# EAGLE board robinson_v01 (EAGLE 7.5.0)
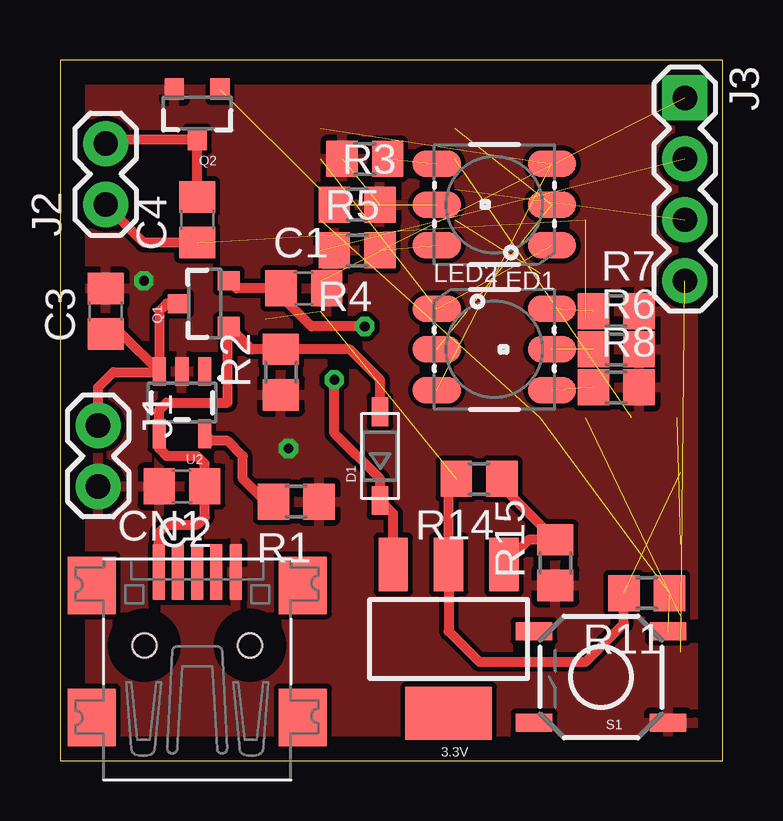
[diagram p0: board, top side]
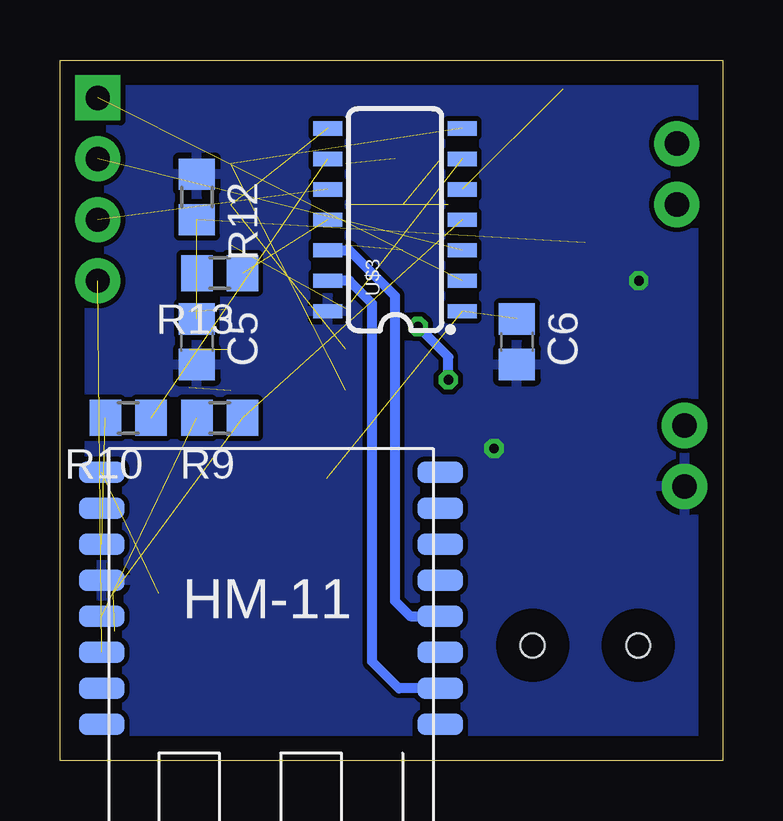
[diagram p1: board, bottom side, seen from below]

Size 27.61 x 29.2 mm. Coordinates in mm from the lower left corner, seen from the top.
Outline: 0,0 27.61,0 27.61,29.2 0,29.2 0,0
Copper layers (1*16): Top 0.035mm / dielectric 1.5mm / Bottom 0.035mm
Design rules "default": minimum track width 10mil, minimum drill 24mil, track to track 8mil, track to pad 8mil, pad to pad 8mil, via to via 8mil, smd to smd 8mil, copper to edge 40mil, drill to drill 8mil, minimum pad ring 10mil, minimum via ring 8mil, stop-mask expansion 4mil, vias tented up to drill 0mil, thermal gap 10mil

## Footprints (pad centres in the part's own frame; a part is rotated, then mirrored left to right if it is on the bottom)
SOT223 = smd 1.219 x 2.235: 1 -2.311,-3.099; 2 0,-3.099; 3 2.311,-3.099 | smd 3.6 x 2.2: 4 0,3.099
C0805 = smd 1.3 x 1.5: 1 -0.95,0; 2 0.95,0
USB-MINIB = smd 0.5 x 2.308: D+ 0,4.064; D- -0.8,4.064; GND 1.6,4.064; ID 0.8,4.064; VBUS -1.6,4.064 | smd 2 x 2.4: GND1 -4.4,-2; GND2 -4.4,3.5; GND3 4.4,3.5; GND4 4.4,-2 | hole 1: -2.2,1; 2.2,1
SOD-123 = smd 1.2 x 0.7: A 1.85,0; C -1.85,0
1X02 = drill 1.016 pad 1.88: 1 0,0; 2 2.54,0
1X04 = drill 1.016 pad 1.88 square: 1 0,0 | drill 1.016 pad 1.88: 2 2.54,0; 3 5.08,0; 4 7.62,0
LED-TRICOLOR-5050 = smd 2 x 1.1: 1 -2.4,1.7; 2 -2.4,0; 3 -2.4,-1.7; 4 2.4,-1.7; 5 2.4,0; 6 2.4,1.7
SOT23-3 = smd 0.8 x 0.9: 1 -0.95,-1; 2 0.95,-1; 3 0,1.1
R0805 = smd 1.3 x 1.5: 1 -0.95,0; 2 0.95,0
TACTILE-SWITCH-SMD = smd 1.524 x 0.762: 1 -2.794,1.905; 2 2.794,1.905; 3 -2.794,-1.905; 4 2.794,-1.905
SOT23-5 = smd 0.55 x 1.2: 1 -0.95,-1.3; 2 0,-1.3; 3 0.95,-1.3; 4 0.95,1.3; 5 -0.95,1.3
HM-11 = smd 1.9 x 0.9: 1 -0.3,11.5; 2 -0.3,10; 3 -0.3,8.5; 4 -0.3,7; 5 -0.3,5.5; 6 -0.3,4; 7 -0.3,2.5; 8 -0.3,1; 9 13.8,1; 10 13.8,2.5; 11 13.8,4; 12 13.8,5.5; 13 13.8,7; 14 13.8,8.5; 15 13.8,10; 16 13.8,11.5
SO14 = smd 0.6 x 1.2: 1 -3.81,-2.8; 2 -2.54,-2.8; 3 -1.27,-2.8; 4 0,-2.8; 5 1.27,-2.8; 6 2.54,-2.8; 7 3.81,-2.8; 8 3.81,2.8; 9 2.54,2.8; 10 1.27,2.8; 11 0,2.8; 12 -1.27,2.8; 13 -2.54,2.8; 14 -3.81,2.8

## Placement (x,y rotation side)
3.3V  V_REG_317SMD  [SOT223]  16.19,5.08 180 top
C1  1uF  [C0805]  10.16,19.68 0 top
C2  4.7uF  [C0805]  5.08,11.43 180 top
C3  4.7uF  [C0805]  1.91,18.73 90 top
C4  .1uF  [C0805]  5.71,22.54 90 top
C5  .1uF  [C0805]  21.91,17.46 270 bottom
C6  4.7uF  [C0805]  8.57,17.46 270 bottom
CN1  [USB-MINIB]  5.71,3.81 0 top
D1  B130LAW  [SOD-123]  13.34,12.7 90 top
J1  3.7_LIPO  [1X02]  1.59,13.97 270 top
J2  3.3-4.5 Motor  [1X02]  1.91,23.18 90 top
J3  [1X04]  26.04,27.62 270 top
LED1  LED-TRICOLOR-5050NO_IC  [LED-TRICOLOR-5050]  18.1,23.18 180 top
LED2  LED-TRICOLOR-5050NO_IC  [LED-TRICOLOR-5050]  18.1,17.14 0 top
Q1  DMP1045U  [SOT23-3]  6.03,19.05 90 top
Q2  MMBT2222A  [SOT23-3]  5.71,26.99 180 top
R1  [R0805]  9.84,10.79 180 top
R2  100K  [R0805]  9.21,16.19 90 top
R3  180  [R0805]  12.38,23.18 0 top
R4  110  [R0805]  12.38,21.27 180 top
R5  110  [R0805]  12.7,25.08 180 top
R6  180  [R0805]  23.18,17.14 0 top
R7  110  [R0805]  23.18,18.73 0 top
R8  110  [R0805]  23.18,15.56 0 top
R9  470  [R0805]  20.95,14.29 180 bottom
R10  470  [R0805]  24.77,14.29 180 bottom
R11  10K  [R0805]  24.45,6.99 180 top
R12  10M  [R0805]  21.91,23.5 270 bottom
R13  10M  [R0805]  20.95,20.32 180 bottom
R14  240  [R0805]  17.46,11.75 180 top
R15  390  [R0805]  20.64,8.26 90 top
S1  RESET  [TACTILE-SWITCH-SMD]  22.54,3.49 180 top
U2  MCP73831  [SOT23-5]  5.08,14.92 180 top
U$1  HM-11  [HM-11]  12.06,13.02 180 bottom
U$3  ATTINY84  [SO14]  13.65,22.54 90 bottom

## Library data of the parts
3.3V = SparkFun-PowerIC
C1-C6 R1-R15 = resistor
CN1 D1 = adafruit
J1 J2 = SparkFun-Connectors
J3 = SparkFun-Connectors; PROD_ID: CONN-09696
LED1 LED2 = SparkFun-LED
Q1 = SparkFun-DiscreteSemi; PROD_ID: TRANS-08285
Q2 = SparkFun-DiscreteSemi; PROD_ID: TRANS-08049
S1 = SparkFun-Retired; PROD_ID: SWCH-08247
U2 = SparkFun-PowerIC; PROD_ID: IC-09995
U$1 = HM-11-ladvien
U$3 = SparkFun-DigitalIC; PROD_ID: IC-11285

## Nets
5V: C2.1 CN1.VBUS D1.A Q1.1 R2.2 U2.4
BATT_MONT: R13.1 U$3.11
BLUE: LED1.3 LED2.3 U$3.7
GND: C1.2 C2.2 C3.2 C5.2 C6.2 CN1.GND J1.2 Q2.2 R1.1 R2.1 R3.2 R4.2 R5.2 R6.2 R7.2 R8.2 R12.1 R15.1 S1.1 U2.2 U$1.12 U$3.14
GREEN: LED1.1 LED2.1 U$3.6
HM_RES: R10.1 U$3.9
MOTOR: Q2.1 U$3.5
N$6: R10.2 U$1.11
N$7: C4.2 J2.2 Q2.3
N$9: 3.3V.1 R14.1 R15.2
N$18: LED1.5 R3.1
N$19: 3.3V.3 C1.1 D1.C Q1.2
N$20: R1.2 U2.5
N$21: LED1.6 R4.1
N$23: LED1.4 R5.1
N$27: LED2.5 R6.1
N$28: LED2.6 R7.1
N$29: LED2.4 R8.1
PA3: J3.3 U$3.10
PB0: J3.1 U$3.2
PB1: J3.2 U$3.3
PIO2: J3.4 U$1.14
PIO3: R9.2 U$1.13
RED: LED1.2 LED2.2 U$3.8
RESET: R9.1 R11.1 S1.3 U$3.4
RX: U$1.2 U$3.13
TX: U$1.4 U$3.12
V_BAT: C3.1 J1.1 Q1.3 U2.3
V_BATT: C4.1 C5.1 J2.1 R12.2 R13.2
VCC: 3.3V.2 C6.1 R11.2 R14.2 U$1.9 U$3.1

## Tracks (layer width: path | path; a pad name or v marks a point on that pad's centre or on a via)
5V
  Top 0.406: CN1.VBUS 4.12,9.51 4.45,9.84 5.71,9.84 6.03,10.16 C2.1 6.03,12.38 5.71,12.7 4.45,12.7 4.13,13.02 U2.4 4.13,14.61 4.45,14.92 6.99,14.92 6.99,18.05 Q1.1 7.99,17.14 R2.2 12.06,17.14 13.34,15.88 D1.A
BATT_MONT  (1 unrouted)
BLUE  (2 unrouted)
GND  (via drill 0.4)  (1 unrouted)
  other vias: 9.53,13.02 3.49,20
  pour Bottom: 0,0 -0.32,29.21 27.94,29.21 27.94,0
  pour Top: 0,0 -0.32,29.84 27.94,29.84 27.94,0
GREEN  (2 unrouted)
HM_RES  (1 unrouted)
MOTOR  (1 unrouted)
N$6  (1 unrouted)
N$7
  Top 0.406: C4.2 Q2.3 2.08,25.89 J2.2
N$9
  Top 0.406: R14.1 18.41,11.43 R15.2 19.53,9.21 3.3V.1
N$18  (1 unrouted)
N$19  (via drill 0.4)
  Top 0.406: 3.3V.3 13.88,10.3 D1.C 13.34,11.75 11.43,13.65 v11.43,15.88 | v12.7,18.1 10.48,18.1 9.53,19.05 9.53,19.37 C1.1 7.35,19.68 Q1.2
  Bottom 0.406: v11.43,15.88 11.43,16.83 v12.7,18.1
N$20
  Top 0.406: R1.2 8.57,10.79 7.62,11.75 7.62,12.7 6.99,13.34 6.32,13.34 U2.5
N$21  (1 unrouted)
N$23  (1 unrouted)
N$27  (1 unrouted)
N$28  (1 unrouted)
N$29  (1 unrouted)
PA3  (1 unrouted)
PB0  (1 unrouted)
PB1  (1 unrouted)
PIO2  (1 unrouted)
PIO3  (1 unrouted)
RED  (2 unrouted)
RESET  (3 unrouted)
RX
  Bottom 0.406: U$1.2 13.49,3.02 14.61,4.13 14.61,19.05 15.56,20 U$3.13
TX
  Bottom 0.406: U$3.12 15.56,21.27 13.65,19.37 13.65,6.67 13.02,6.03 11.78,6.03 U$1.4
V_BAT
  Top 0.406: J1.1 1.59,15.56 2.22,16.19 4.1,16.19 U2.3 | C3.1 2.57,17.78 U2.3 | Q1.3 4.45,19.05 4.13,18.73 U2.3
V_BATT  (3 unrouted)
  Top 0.406: C4.1 3.49,21.59 J2.1
VCC  (3 unrouted)
  Top 0.406: R14.2 16.19,11.43 3.3V.2 16.19,5.4 17.46,4.13 21.91,4.13 23.5,5.71 R11.2